# EAGLE board dcdc 1.1 0223 (EAGLE 9.6.2)
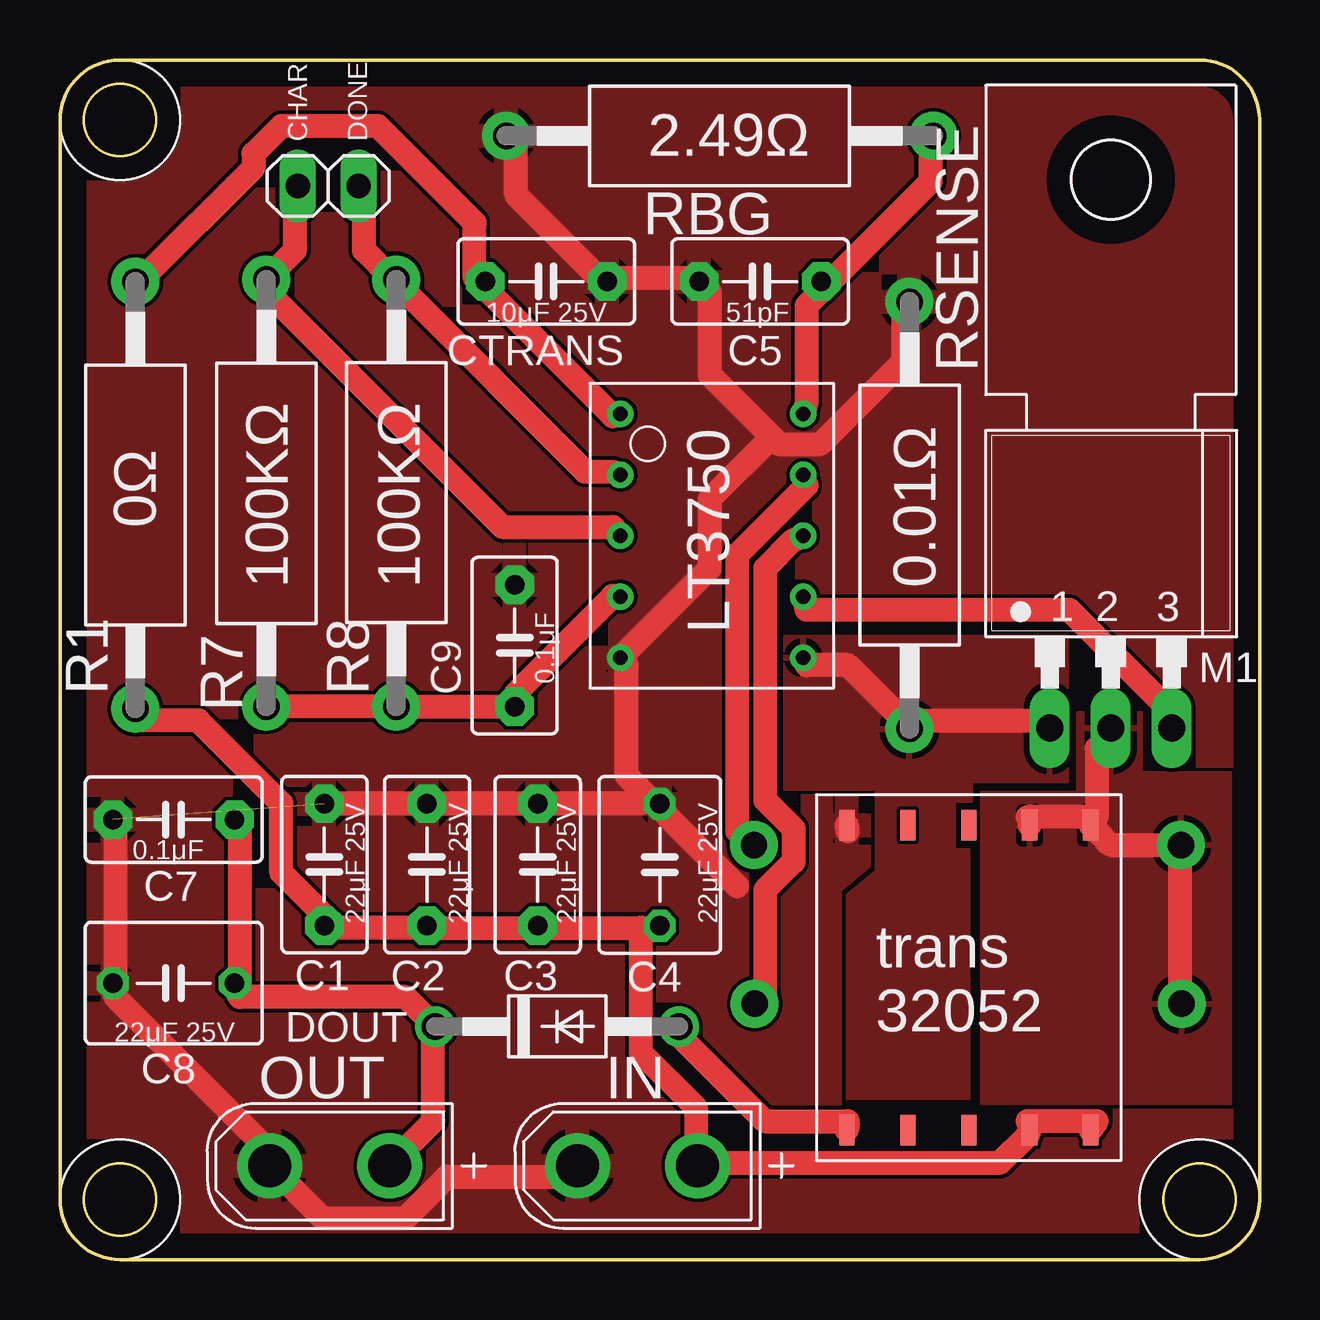
[diagram p0: board, top side]
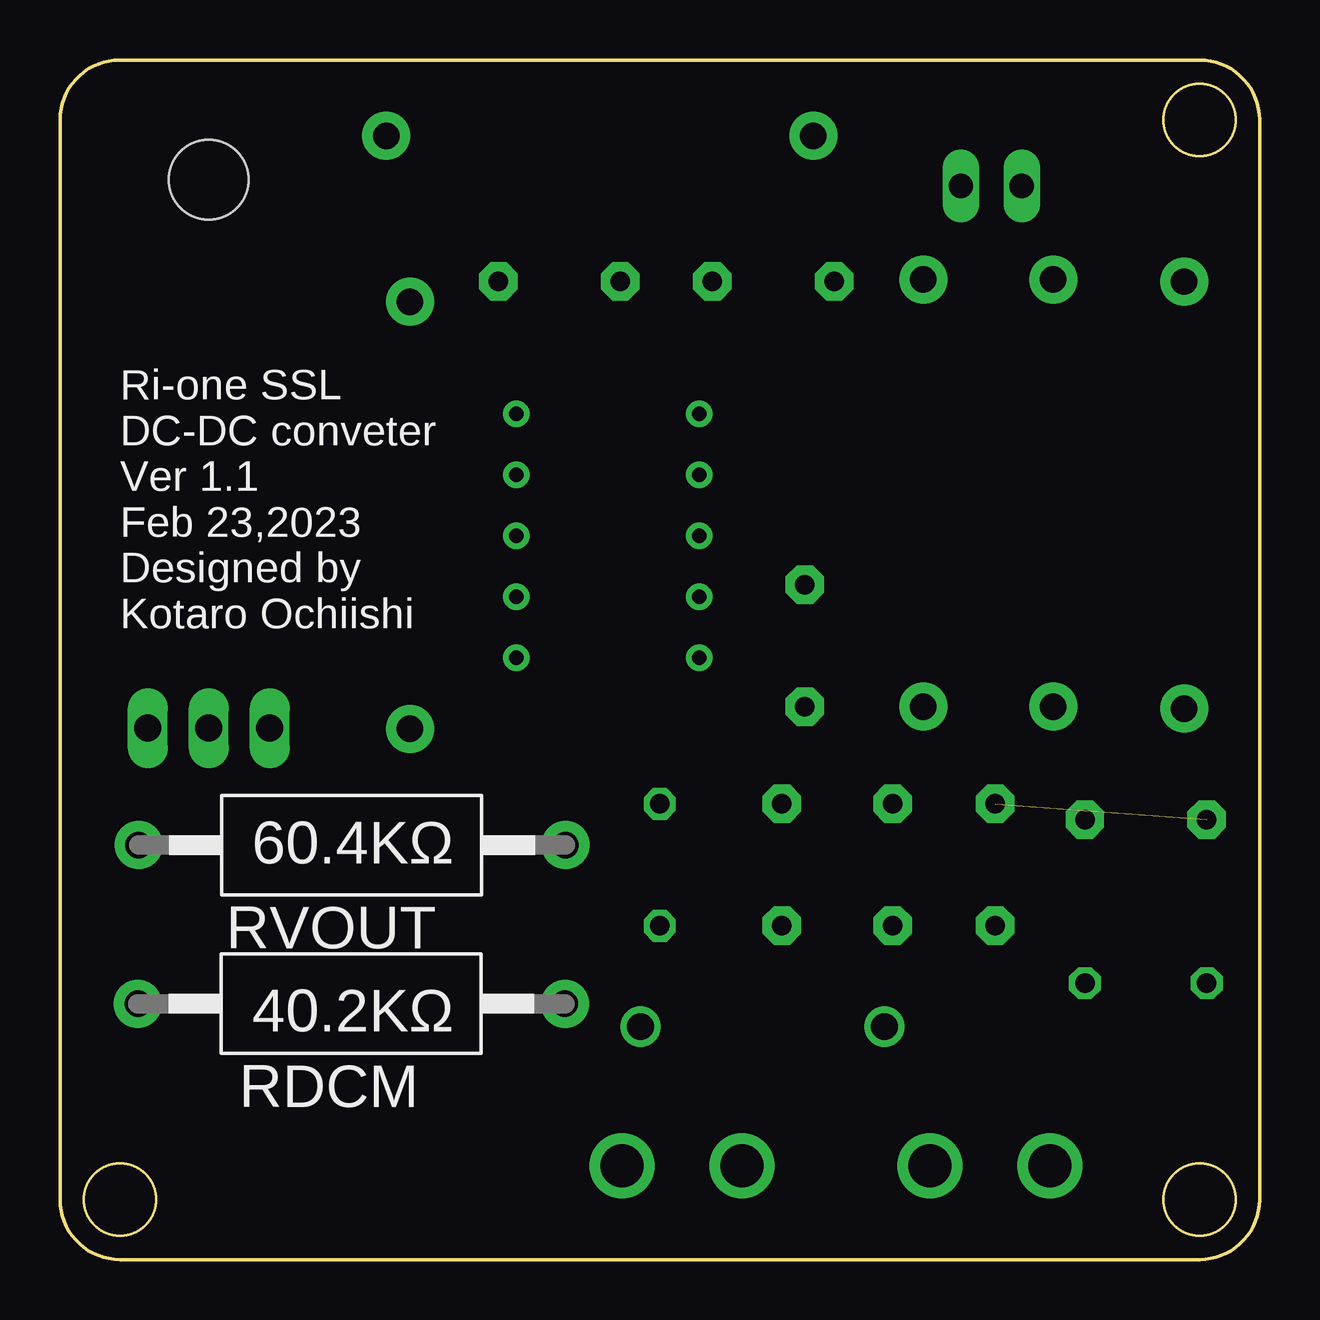
[diagram p1: board, bottom side, seen from below]

Size 50 x 50 mm. Coordinates in mm from the lower left corner, seen from the top.
Outline: 0,47.5 0,2.5 arc90 2.5,0 47.5,0 arc90 50,2.5 50,47.5 arc90 47.5,50 2.5,50 arc90 0,47.5
Outline: circle at 2.5,2.5 radius 1.5
Outline: circle at 47.5,2.5 radius 1.5
Outline: circle at 2.5,47.5 radius 1.5
Copper layers (1+2*15+16): Top 0.035mm / dielectric 1.5mm / Route2 0.035mm / dielectric 0.15mm / Route15 0.035mm / dielectric 0.2mm / Bottom 0.035mm
Design rules "default *": minimum track width 6mil, minimum drill 0.35mm, track to track 6mil, track to pad 6mil, pad to pad 6mil, via to via 6mil, smd to smd 6mil, copper to edge 40mil, drill to drill 6mil, minimum pad ring 10mil, minimum via ring 8mil, stop-mask expansion 4mil, vias tented up to drill 0mil, thermal gap 10mil
Net classes: 0 default: width 1 mm, drill 0.25 mm

## Footprints (pad centres in the part's own frame; a part is rotated, then mirrored left to right if it is on the bottom)
C5B3.5 = drill 0.813 pad 1.6 octagon: 1 -2.54,0; 2 2.54,0
C050-050X075 = drill 0.813 octagon: 1 -2.54,0; 2 2.54,0
DO41-10 = drill 1.118: A 5.08,0; C -5.08,0
XT30UPB-M = drill 1.8: + 2.5,0; - -2.5,0
1X02 = drill 1.016 long: 1 -1.27,0; 2 1.27,0
TO202 = drill 1.118 long: 1 -2.54,-5.08; 2 0,-5.08; 3 2.54,-5.08 | hole 3.302: 0,17.78
AC01 = drill 1.1 pad 2: 1 -8.9,0; 2 8.9,0
LT3750 = drill 0.6: P$1 0,12.7; P$2 0,10.16; P$3 0,7.62; P$4 0,5.08; P$5 0,2.54; P$6 7.62,2.54; P$7 7.62,5.08; P$8 7.62,7.62; P$9 7.62,10.16; P$10 7.62,12.7
32052 = smd 1.27 x 0.635: P$1 1.27,11.43; P$2 1.27,8.89; P$3 1.27,6.35; P$4 1.27,3.81; P$5 1.27,1.27; P$6 13.97,11.43; P$7 13.97,8.89; P$8 13.97,6.35; P$9 13.97,3.81; P$10 13.97,1.27

## Placement (x,y rotation side)
C1  [C5B3.5]  11.02,16.46 90 top
C2  [C5B3.5]  15.3,16.46 90 top
C3  [C5B3.5]  19.91,16.46 90 top
C4  [C050-050X075]  25,16.45 90 top
C5  [C5B3.5]  29.18,40.77 180 top
C7  [C5B3.5]  4.74,18.34 180 top
C8  [C050-050X075]  4.74,11.52 180 top
C9  [C5B3.5]  18.95,25.59 90 top
CTRANS  [C5B3.5]  20.27,40.77 180 top
DOUT  1N4004  [DO41-10]  20.72,9.71 0 top
IN  XT30UPB-M  [XT30UPB-M]  24.07,3.91 0 top
JP1  PINHD-1X2  [1X02]  11.18,44.75 0 top
M1  BSS97  [TO202]  43.8,27.23 0 top
OUT  XT30UPB-M  [XT30UPB-M]  11.24,3.91 0 top
R1  [AC01]  3.14,31.86 90 top
R7  [AC01]  8.6,31.95 270 top
R8  [AC01]  14.02,31.95 90 top
RBG  [AC01]  27.5,46.84 180 top
RDCM  [AC01]  37.86,10.67 180 bottom
RSENSE  [AC01]  35.41,31.02 90 top
RVOUT  [AC01]  37.83,17.28 180 bottom
U$1  [LT3750]  23.36,22.55 0 top
U$2  [32052]  44.23,4.13 90 top

## Library data of the parts
C1-C3 C5 C7 C9 CTRANS = capacitor-wima
C4 C8 = rcl; SPICEPREFIX: C
DOUT = diode
IN OUT = amass
JP1 = Connector; CATEGORY: CONNECTOR; SUB-CATEGORY: PIN-HEADER
M1 = transistor-fet
R1 R7 R8 RBG RDCM RSENSE RVOUT = resistor-power; OC_FARNELL: unknown; OC_NEWARK: unknown
U$1 U$2 = boostTest1215

## Nets
0: C1.2 C2.2 C3.2 C4.2 C5.2 C7.2 C8.2 C9.2 CTRANS.1 IN.- OUT.- RBG.2 RSENSE.2 U$1.P$5 U$2.P$6
DRAIN: M1.2 RDCM.2 RVOUT.2 U$2.P$9 U$2.P$10
N$1: C9.1 R7.2 R8.1 U$1.P$4
N$2: C5.1 RBG.1 U$1.P$10
N$3: RVOUT.1 U$1.P$9
N$4: RDCM.1 U$1.P$8
N$5: JP1.1 R7.1 U$1.P$3
N$6: M1.3 U$1.P$7
N$7: DOUT.A U$2.P$1
N$8: JP1.2 R8.2 U$1.P$2
N$10: C7.1 C8.1 DOUT.C OUT.+
N$13: C1.1 C2.1 C3.1 C4.1 IN.+ R1.1 U$2.P$4 U$2.P$5
N$14: CTRANS.2 R1.2 U$1.P$1
SOURCE: M1.1 RSENSE.1 U$1.P$6

## Tracks (layer width: path | path; a pad name or v marks a point on that pad's centre or on a via)
0  (1 unrouted)
  Top 1: C1.2 11.52,19.02 14.98,19.02 C2.2 15.56,19.02 19.59,19.02 C3.2 20.17,19.02 24.2,19.02 24.49,19.3 | 28.23,15.56 25.35,18.44 C4.2 24.78,19.02 24.49,19.3 | 32.84,17.86 U$2.P$6 | 24.49,19.3 23.62,20.17 23.62,24.78 U$1.P$5 23.62,25.35 27.08,28.81 27.08,31.69 29.67,34.28 | RBG.2 19.02,46.67 19.02,44.37 22.47,40.91 CTRANS.1 23.05,40.91 26.5,40.91 C5.2 27.08,40.33 27.08,36.88 29.67,34.28 | 29.67,34.28 29.96,34 31.69,34 35.15,37.45 35.15,39.76 RSENSE.2 | C7.2 2.31,17.86 2.31,11.52 C8.2 2.31,10.95 9.22,4.03 OUT.- 9.22,3.46 10.95,1.73 14.4,1.73 16.13,3.46 21.32,3.46 IN.-
  pour Top (rank 3): 0,50 0,0 50,0 50,50
DRAIN
  Top 1: 43.22,18.44 40.33,18.44 U$2.P$9 | 43.22,18.44 43.22,21.32 43.79,21.9 M1.2 | 43.22,18.44 U$2.P$10 43.22,17.86 43.79,17.29 46.67,17.29 RVOUT.2 46.67,16.71 46.67,10.95 RDCM.2
  pour Top: 42.4,22.4 42.4,19.5 38.4,19.5 38.4,6.5 48.8,6.5 48.8,20.3 45.1,20.3 45.1,22.8 42.4,22.8
N$1
  Top 1: U$1.P$4 23.05,27.66 19.02,23.62 C9.1 18.44,23.05 14.4,23.05 R8.1 13.83,23.05 8.64,23.05 R7.2
N$2
  Top 1: U$1.P$10 31.11,35.72 31.11,39.76 31.69,40.33 C5.1 32.27,40.91 36.3,44.94 36.3,46.67 RBG.1
N$3
  Top 1: U$1.P$9 31.11,32.27 28.23,29.39 28.23,17.86 28.81,17.29 RVOUT.1
N$4
  Top 1: U$1.P$8 30.54,29.96 29.39,28.81 29.39,19.16 30.58,17.96 30.58,16.59 29.39,15.4 29.39,10.95 RDCM.1
N$5
  Top 1: U$1.P$3 23.05,30.54 18.44,30.54 8.64,40.33 R7.1 8.64,40.91 9.79,42.06 9.79,44.37 JP1.1
N$6
  Top 1: U$1.P$7 31.11,27.08 42.06,27.08 46.67,22.47 M1.3
N$7
  Top 1: U$2.P$1 32.84,5.76 29.39,5.76 25.93,9.22 DOUT.A
N$8
  Top 1: U$1.P$2 23.05,32.84 21.9,32.84 14.4,40.33 R8.2 13.83,40.91 12.68,42.06 12.68,44.37 JP1.2
N$10
  Top 1: C7.1 7.49,17.86 7.49,11.52 C8.1 7.49,10.95 14.4,10.95 15.56,9.79 DOUT.C 15.56,9.22 15.56,5.76 13.83,4.03 OUT.+
N$13
  Top 1: U$2.P$5 43.22,5.76 40.33,5.76 U$2.P$4 40.33,5.19 39.18,4.03 27.08,4.03 IN.+ 26.5,4.03 26.5,6.34 24.2,8.64 24.2,13.83 | 24.2,13.83 20.17,13.83 C3.1 19.59,13.83 15.56,13.83 C2.1 14.98,13.83 11.52,13.83 C1.1 10.95,14.4 9.22,16.13 9.22,19.02 5.76,22.47 3.46,22.47 R1.1 | 24.2,13.83 24.78,13.83 C4.1
N$14
  Top 1: U$1.P$1 23.05,35.15 17.86,40.33 CTRANS.2 17.29,40.91 17.29,43.22 13.25,47.25 9.22,47.25 8.07,46.1 8.07,45.52 3.46,40.91 R1.2
SOURCE
  Top 1: U$1.P$6 31.11,24.78 32.84,24.78 35.15,22.47 RSENSE.1 35.72,22.47 40.91,22.47 M1.1
  pour Top: 30.2,25.9 30.2,19.6 34,19.6 34,16.2 32.8,15.2 32.8,6.7 37.9,6.7 37.9,17.1 37.3,17.1 37.3,19.1 38,19.1 38,19.9 42,19.9 42,26 30.2,26

## Text on the board
tPlace: CHAR | DONE | 2.49Ω | 10μF 25V | 51pF | 0Ω | 100KΩ | 100KΩ | 0.01Ω | LT3750 | 0.1μF | 0.1μF | 22μF 25V | 22μF 25V | 22μF 25V | 22μF 25V | 22μF 25V | trans / 32052
bPlace: Ri-one SSL / DC-DC conveter / Ver 1.1 / Feb 23,2023 / Designed by / Kotaro Ochiishi | 60.4KΩ | 40.2KΩ